# EAGLE board MorpheusAudio (EAGLE 5.11)
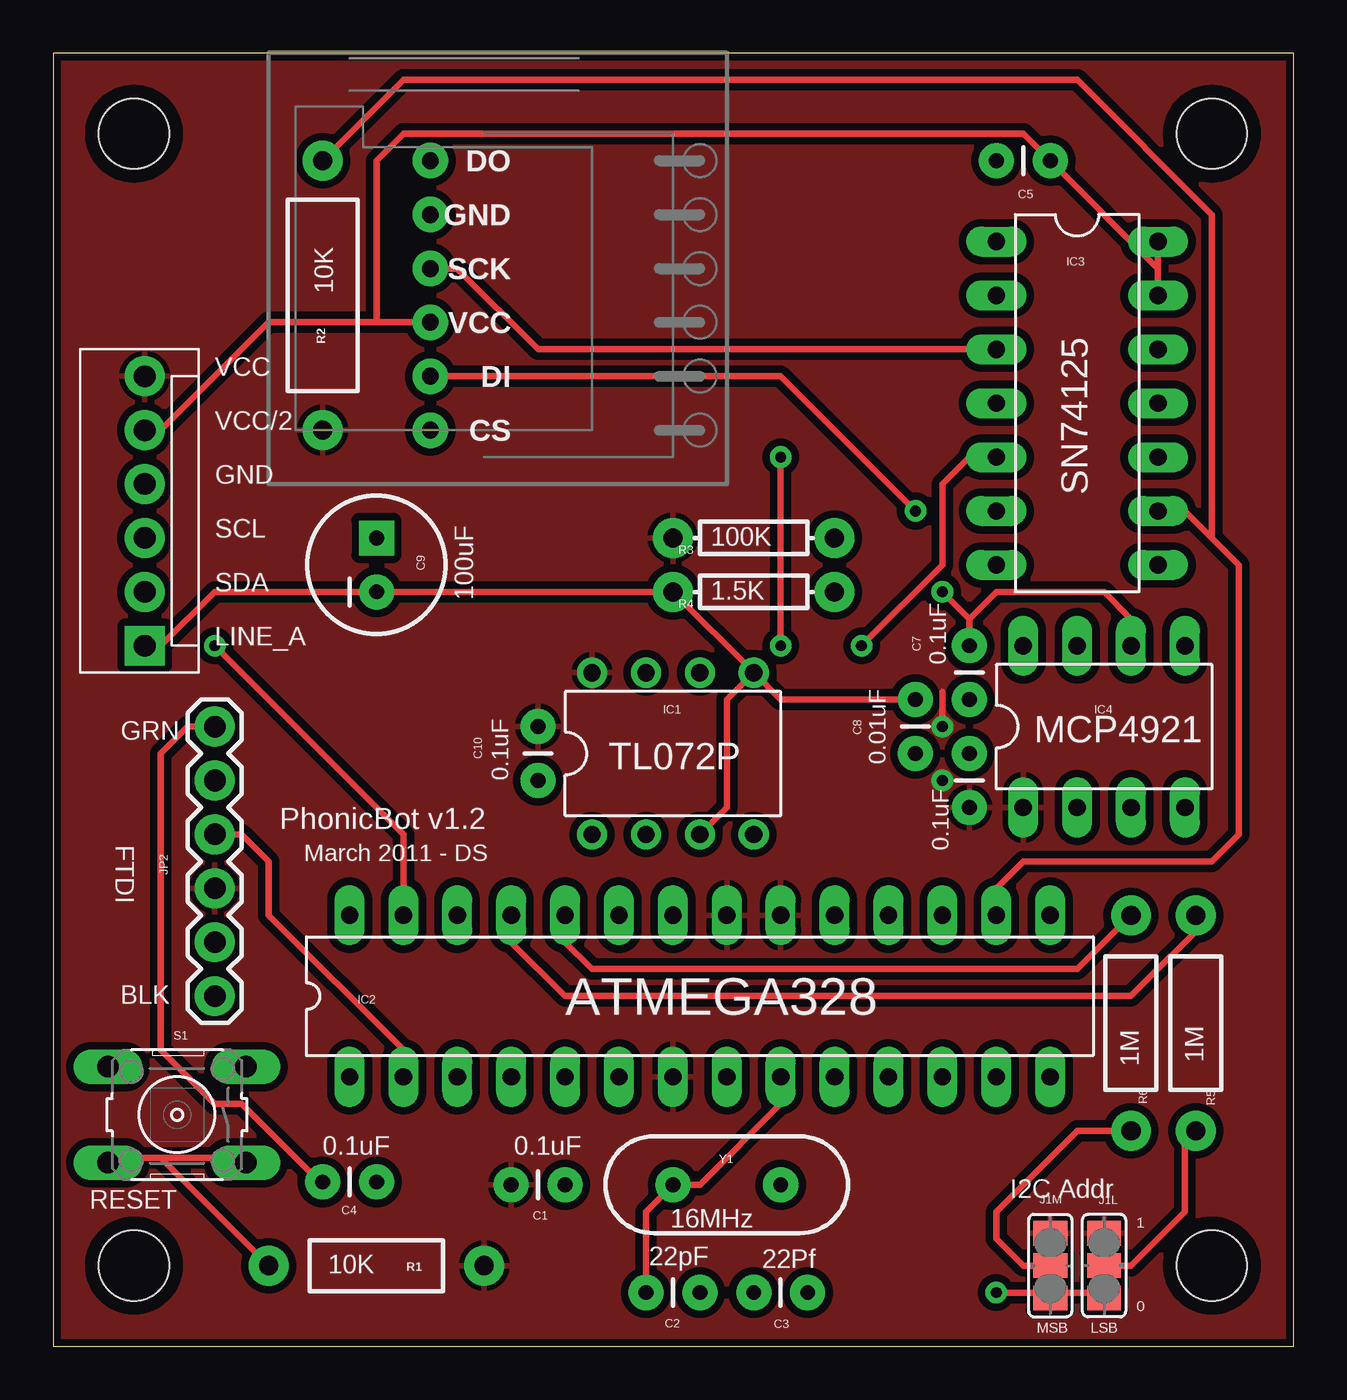
[diagram p0: board, top side]
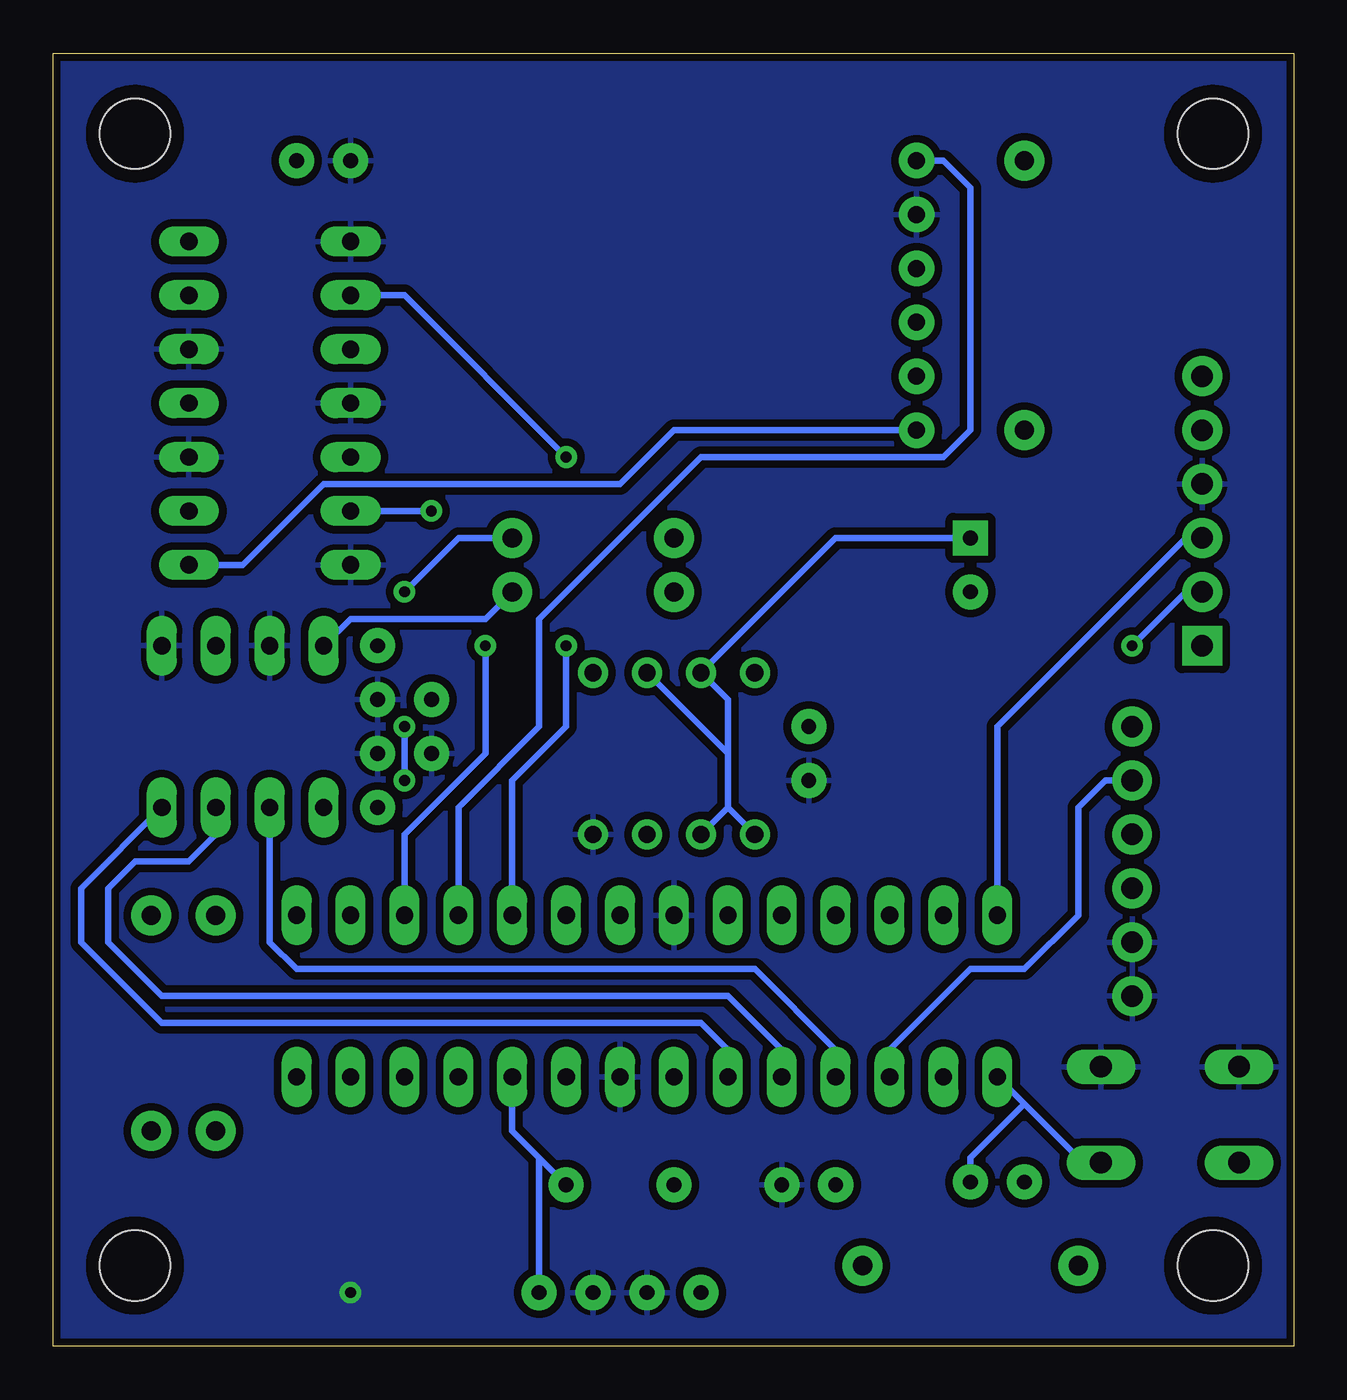
[diagram p1: board, bottom side, seen from below]

Size 58.47 x 60.95 mm. Coordinates in mm from the lower left corner, seen from the top.
Outline: 0,0 58.47,0 58.47,60.95 0,60.95 0,0
Copper layers (1*16): Top 0.035mm / dielectric 1.5mm / Bottom 0.035mm
Design rules "SparkFun": minimum track width 12mil, minimum drill 20mil, track to track 8mil, track to pad 8mil, pad to pad 8mil, via to via 8mil, smd to smd 8mil, copper to edge 10mil, drill to drill 8mil, minimum pad ring 12mil, minimum via ring 10mil, stop-mask expansion 4mil, vias tented up to drill 25mil, thermal gap 10mil

## Footprints (pad centres in the part's own frame; a part is rotated, then mirrored left to right if it is on the bottom)
CAP-PTH-SMALL = drill 0.7 pad 1.651 round: 1 0,0; 2 2.54,0
CPOL-RADIAL-100UF-25V = drill 0.7 pad 1.651 square: 1 1.27,0 | drill 0.7 pad 1.651 round: 2 -1.27,0
DIL08 = drill 0.813 pad 1.27 round: 1 -3.81,-3.81; 2 -1.27,-3.81; 3 1.27,-3.81; 4 3.81,-3.81; 5 3.81,3.81; 6 1.27,3.81; 7 -1.27,3.81; 8 -3.81,3.81
DIL28-3 = drill 0.813 long: 1 -16.51,-3.81; 2 -13.97,-3.81; 3 -11.43,-3.81; 4 -8.89,-3.81; 5 -6.35,-3.81; 6 -3.81,-3.81; 7 -1.27,-3.81; 8 1.27,-3.81; 9 3.81,-3.81; 10 6.35,-3.81; 11 8.89,-3.81; 12 11.43,-3.81; 13 13.97,-3.81; 14 16.51,-3.81; 15 16.51,3.81; 16 13.97,3.81; 17 11.43,3.81; 18 8.89,3.81; 19 6.35,3.81; 20 3.81,3.81; 21 1.27,3.81; 22 -1.27,3.81; 23 -3.81,3.81; 24 -6.35,3.81; 25 -8.89,3.81; 26 -11.43,3.81; 27 -13.97,3.81; 28 -16.51,3.81
DIL14 = drill 0.813 long: 1 -7.62,-3.81; 2 -5.08,-3.81; 3 -2.54,-3.81; 4 0,-3.81; 5 2.54,-3.81; 6 5.08,-3.81; 7 7.62,-3.81; 8 7.62,3.81; 9 5.08,3.81; 10 2.54,3.81; 11 0,3.81; 12 -2.54,3.81; 13 -5.08,3.81; 14 -7.62,3.81
DIL08' = drill 0.813 long: 1 -3.81,-3.81; 2 -1.27,-3.81; 3 1.27,-3.81; 4 3.81,-3.81; 5 3.81,3.81; 6 1.27,3.81; 7 -1.27,3.81; 8 -3.81,3.81
SJ_2 = smd 1.168 x 1.6: 1 -1.524,0; 2 0,0; 3 1.524,0
STAND-OFF = hole 3.302: 0,0
FTDI_BASIC = drill 1.016 pad 1.88 round: CTS 10.16,0; DTR 0,0; GND 12.7,0; RXI 2.54,0; TXO 5.08,0; VCC 7.62,0
MOLEX-1X6 = drill 1.016 pad 1.88 square: 1 0,0 | drill 1.016 pad 1.88 round: 2 2.54,0; 3 5.08,0; 4 7.62,0; 5 10.16,0; 6 12.7,0
AXIAL-0.4 = drill 0.9 pad 1.88 round: P$1 -5.08,0; P$2 5.08,0
AXIAL-0.5 = drill 0.9 pad 1.88 round: P$1 -6.35,0; P$2 6.35,0
AXIAL-0.3 = drill 0.9 pad 1.88 round: P$1 -3.81,0; P$2 3.81,0
B3F-10XX = drill 1.016 long: 1 -3.251,2.261; 2 3.251,2.261; 3 -3.251,-2.261; 4 3.251,-2.261
USD_BREAKOUT = drill 0.8 pad 1.676 round: CS 7.62,2.54; DI 7.62,5.08; DO 7.62,15.24; GND 7.62,12.7; SCK 7.62,10.16; VCC 7.62,7.62
HC49US = drill 0.7 pad 1.651 round: 1 -2.54,0; 2 2.54,0

## Placement (x,y rotation side)
C1  0.1uF  [CAP-PTH-SMALL]  24.13,7.62 180 top
C2  22pF  [CAP-PTH-SMALL]  30.48,2.54 180 top
C3  22Pf  [CAP-PTH-SMALL]  33.02,2.54 0 top
C4  0.1uF  [CAP-PTH-SMALL]  12.7,7.75 0 top
C5  0.1uF  [CAP-PTH-SMALL]  44.45,55.88 0 top
C6  0.1uF  [CAP-PTH-SMALL]  43.18,27.94 270 top
C7  0.1uF  [CAP-PTH-SMALL]  43.18,30.48 90 top
C8  0.01uF  [CAP-PTH-SMALL]  40.64,30.48 270 top
C9  100uF  [CPOL-RADIAL-100UF-25V]  15.24,36.83 90 top
C10  0.1uF  [CAP-PTH-SMALL]  22.86,26.67 90 top
IC1  TL072P  [DIL08]  29.21,27.94 0 top
IC2  ATMEGA328  [DIL28-3]  30.48,16.51 0 top
IC3  SN74125  [DIL14]  48.26,44.45 270 top
IC4  MCP4921  [DIL08']  49.53,29.21 0 top
J1L  [SJ_2]  49.53,3.81 90 top
J1M  [SJ_2]  46.99,3.81 270 top
JP1  STAND-OFF  [STAND-OFF]  3.81,3.81 0 top
JP2  FTDI  [FTDI_BASIC]  7.62,29.21 270 top
JP3  STAND-OFF  [STAND-OFF]  54.61,57.15 0 top
JP4  STAND-OFF  [STAND-OFF]  3.81,57.15 0 top
JP5  STAND-OFF  [STAND-OFF]  54.61,3.81 0 top
PWR  PWR  [MOLEX-1X6]  4.32,33.02 90 top
R1  10K  [AXIAL-0.4]  15.24,3.81 0 top
R2  10K  [AXIAL-0.5]  12.7,49.53 270 top
R3  100K  [AXIAL-0.3]  33.02,38.1 0 top
R4  1.5K  [AXIAL-0.3]  33.02,35.56 0 top
R5  1M  [AXIAL-0.4]  53.85,15.24 270 top
R6  1M  [AXIAL-0.4]  50.8,15.24 90 top
S1  RESET  [B3F-10XX]  5.84,10.92 180 top
U1  USD_BREAKOUT  [USD_BREAKOUT]  10.16,40.64 0 top
Y1  16MHz  [HC49US]  31.75,7.62 0 top

## Library data of the parts
C1-C10 J1L J1M JP1-JP5 PWR R1-R6 Y1 = SparkFun
IC1 = linear
IC2 = atmel; OC_FARNELL: unknown; OC_NEWARK: unknown
IC3 IC4 = adafruit
S1 = switch-omron; MPN: B3F-1000; OC_FARNELL: 176432; OC_NEWARK: 36M3542
U1 = Dek

## Nets
A0: IC2.23
A1: IC2.24 R6.P$2
A2: IC2.25 R5.P$1
A3: IC2.26
ADR1: IC2.12
ADR2: IC2.13
D5: IC2.11
D8: IC2.14
DAC_CS: IC2.4 IC4.2
DAC_DI: IC2.6 IC4.4
DAC_SCK: IC2.5 IC4.3
DTR: C4.1 JP2.DTR
GND: C1.1 C2.1 C3.1 C5.1 C6.1 C7.1 C8.2 C10.1 IC1.4 IC2.8 IC2.22 IC3.1 IC3.4 IC3.7 IC3.10 IC3.12 IC4.5 IC4.7 J1L.1 J1M.3 JP2.CTS JP2.GND PWR.4 S1.3 S1.4 U1.GND
LINE_A: C8.1 C9.2 IC1.3 IC1.5 PWR.1 R4.P$1
MISO: IC2.18 U1.DO
MMC_CD: IC2.15
MMC_CS: IC2.16 IC3.9 R2.P$1
MOSI: IC2.17 IC3.5
N$1: IC3.8 U1.CS
N$2: IC3.6 U1.DI
N$3: C4.2 IC2.1 R1.P$1 S1.1 S1.2
N$4: J1L.2 R5.P$2
N$5: IC3.3 U1.SCK
N$6: J1M.2 R6.P$1
N$7: IC4.8 R4.P$2
N$8: C9.1 IC1.1 IC1.2 IC1.6 IC1.7
N$19: C7.2 IC4.6 R3.P$2
RX: IC2.2 JP2.TXO
SCK: IC2.19 IC3.2
SCL: IC2.28 PWR.3
SDA: IC2.27 PWR.2
TX: IC2.3 JP2.RXI
VCC: C1.2 C6.2 C10.2 IC1.8 IC2.7 IC2.20 IC2.21 IC4.1 J1L.3 J1M.1 JP2.VCC PWR.6 R1.P$2 R2.P$2 R3.P$1
VCC/2: C5.2 IC3.13 IC3.14 PWR.5 U1.VCC
XTAL1: C2.2 IC2.9 Y1.1
XTAL2: C3.2 IC2.10 Y1.2

## Tracks (layer width: path | path; a pad name or v marks a point on that pad's centre or on a via)
A1
  Top 0.305: IC2.24 24.13,19.05 25.4,17.78 48.26,17.78 R6.P$2
A2
  Top 0.305: IC2.25 21.59,19.05 24.13,16.51 50.8,16.51 54.61,20.32 R5.P$1
DAC_CS
  Bottom 0.305: IC2.4 21.59,13.97 25.4,17.78 46.99,17.78 48.26,19.05 IC4.2
DAC_DI
  Bottom 0.305: IC2.6 26.67,13.97 27.94,15.24 53.34,15.24 57.15,19.05 57.15,21.59 IC4.4
DAC_SCK
  Bottom 0.305: IC2.5 24.13,13.97 26.67,16.51 53.34,16.51 55.88,19.05 55.88,21.59 54.61,22.86 52.07,22.86 50.8,24.13 IC4.3
DTR
  Top 0.305: JP2.DTR 6.35,29.21 5.08,27.94 5.08,13.97 7.62,11.43 8.89,11.43 12.7,7.62 C4.1
GND  (via drill 0.51)
  Top 0.305: 46.99,2.54 49.53,2.54 J1L.1 | 46.99,2.54 v44.45,2.54 | J1M.3 46.99,2.54
  pour Bottom (isolate 0.356): -1.27,62.23 59.69,62.23 59.69,-1.27 -1.27,-1.27
LINE_A
  Top 0.305: PWR.1 5.08,33.02 7.62,35.56 C9.2 R4.P$1 IC1.5 | IC1.3 31.75,25.4 31.75,30.48 IC1.5 | C8.1 34.29,30.48 IC1.5
MISO
  Bottom 0.305: IC2.18 39.37,25.4 35.56,29.21 35.56,34.29 27.94,41.91 16.51,41.91 15.24,43.18 15.24,54.61 16.51,55.88 U1.DO
MMC_CS
  Top 0.305: IC2.16 44.45,21.59 45.72,22.86 54.61,22.86 55.88,24.13 55.88,36.83 54.61,38.1 | 54.61,38.1 53.34,39.37 IC3.9 | R2.P$1 16.51,59.69 48.26,59.69 54.61,53.34 54.61,38.1
MOSI  (via drill 0.51)
  Top 0.305: v38.1,33.02 41.91,36.83 41.91,40.64 43.18,41.91 IC3.5
  Bottom 0.305: IC2.17 41.91,24.13 38.1,27.94 v38.1,33.02
N$1
  Bottom 0.305: IC3.8 49.53,36.83 45.72,40.64 31.75,40.64 29.21,43.18 U1.CS
N$2  (via drill 0.51)
  Top 0.305: v40.64,39.37 34.29,45.72 U1.DI
  Bottom 0.305: v40.64,39.37 IC3.6
N$3
  Top 0.305: 5.08,8.89 8.89,8.89 S1.1 | 5.08,8.89 3.81,8.89 S1.2 | 5.08,8.89 R1.P$1
  Bottom 0.305: 12.7,11.43 10.16,8.89 S1.1 | 12.7,11.43 IC2.1 | 12.7,11.43 15.24,8.89 C4.2 15.24,7.62
N$4
  Top 0.305: J1L.2 50.8,3.81 53.34,6.35 53.34,10.16 R5.P$2
N$5
  Top 0.305: IC3.3 22.86,46.99 19.05,50.8 U1.SCK
N$6
  Top 0.305: J1M.2 45.72,3.81 44.45,5.08 44.45,6.35 48.26,10.16 R6.P$1
N$7
  Bottom 0.305: IC4.8 44.45,34.29 38.1,34.29 R4.P$2
N$8
  Bottom 0.305: IC1.1 26.67,25.4 | 26.67,25.4 IC1.2 | 26.67,25.4 26.67,27.94 | 26.67,27.94 26.67,30.48 IC1.7 21.59,38.1 C9.1 | 26.67,27.94 IC1.6
N$19  (via drill 0.51)
  Top 0.305: IC4.6 50.8,34.29 49.53,35.56 44.45,35.56 43.18,34.29 | 43.18,34.29 C7.2 | v41.91,35.56 43.18,34.29
  Bottom 0.305: R3.P$2 39.37,38.1 v41.91,35.56
RX
  Top 0.305: IC2.2 16.51,13.97 10.16,20.32 10.16,22.86 8.89,24.13 JP2.TXO
SCK  (via drill 0.51)
  Top 0.305: v34.29,33.02 v34.29,41.91
  Bottom 0.305: IC2.19 36.83,26.67 34.29,29.21 v34.29,33.02 | v34.29,41.91 41.91,49.53 IC3.2
SCL
  Bottom 0.305: IC2.28 13.97,29.21 5.08,38.1 PWR.3
SDA  (via drill 0.51)
  Top 0.305: IC2.27 16.51,24.13 v7.62,33.02
  Bottom 0.305: v7.62,33.02 5.08,35.56 PWR.2
TX
  Bottom 0.305: IC2.3 19.05,13.97 15.24,17.78 12.7,17.78 10.16,20.32 10.16,25.4 8.89,26.67 JP2.RXI
VCC  (via drill 0.51)
  Top 0.305: v41.91,29.21 41.91,30.83
  Bottom 0.305: v41.91,26.67 v41.91,29.21
  pour Top (isolate 0.356): -1.27,62.23 59.69,62.23 59.69,-1.27 -1.27,-1.27
VCC/2
  Top 0.305: 52.07,50.8 IC3.14 | 52.07,50.8 IC3.13 | 52.07,50.8 C5.2 45.72,57.15 16.51,57.15 15.24,55.88 15.24,48.26 | 15.24,48.26 10.16,48.26 5.08,43.18 PWR.5 | 15.24,48.26 U1.VCC
XTAL1
  Top 0.305: IC2.9 34.29,11.43 30.48,7.62 Y1.1 27.94,6.35 C2.2
XTAL2
  Bottom 0.305: IC2.10 36.83,10.16 35.56,8.89 | 35.56,8.89 Y1.2 | C3.2 35.56,8.89

## Text on the board
tPlace: VCC | VCC/2 | GND | SCL | SDA | LINE_A | GRN | PhonicBot v1.2 | March 2011 - DS | BLK | I2C Addr | 1 | 0 | MSB | LSB